# Altium PCB main_pcb.PcbDoc (part 2 of 2)
Units mm, origin at the board's own origin, x right, y up, seen from the top; angles counter-clockwise.
Board outline 134.57 x 151.73 mm, 2 copper layers (Top Layer, Bottom Layer); 69 components, 251 nets, 826 pads, 101 vias.
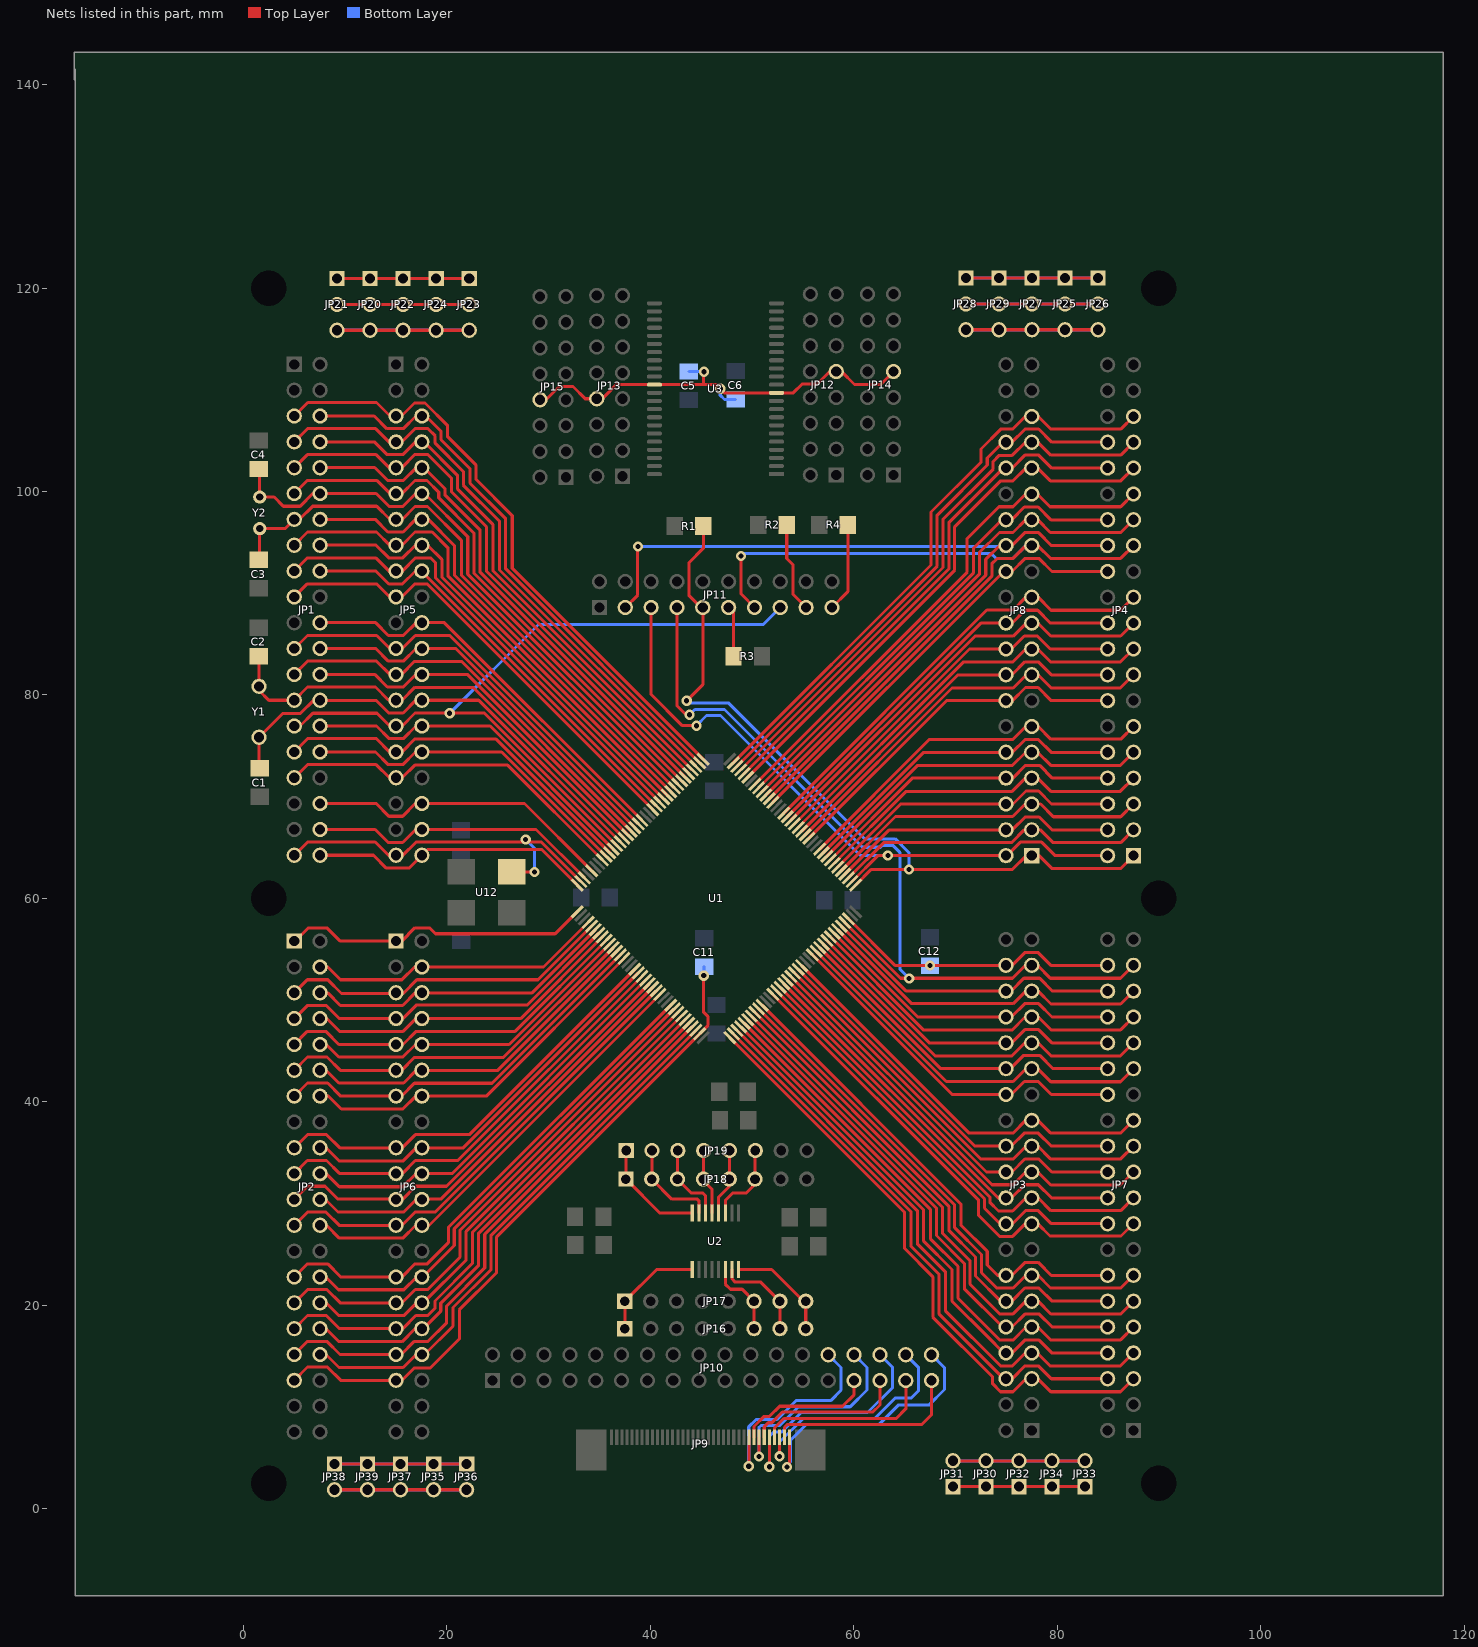
[diagram p2: the nets of this part, all layers, seen from the top]

## Via types
v1: diameter 1, hole 0.5, Top Layer to Bottom Layer, 64 vias
v2: diameter 1.5, hole 1, Top Layer to Bottom Layer, 33 vias
v3: diameter 1.5, hole 1.5, Top Layer to Bottom Layer, 4 vias

## Nets (pads, with @x,y where several pads share a name; then routed paths per layer and width w, separated by ;. In a path a pad name is that pad's centre, name@x,y a point inside that pad or via, vN(x,y) a via of type N, cw(c..) or ccw(c..) an arc to the next point about the centre after c; other vN are vias at no path point) (continued)
NetJP9_28: JP9.28 JP10.28 | length 21.3
  Top Layer w0.3: v1(49.675,4.175) 49.7,4.2 JP9.28@49.7,7.025
  Bottom Layer w0.3: v1(49.675,4.175) 49.675,8.05 50.4,8.775 52.475,8.775 54.325,10.625 57.725,10.625 58.75,11.65 58.75,13.885 JP10.28@57.495,15.14
NetJP9_29: JP9.29 JP10.29 | length 13.6
  Top Layer w0.3: JP9.29@50.2,7.025 50.2,8.075 51.2,9.075 51.725,9.075 52.725,10.075 58.9,10.075 60.035,11.21 JP10.29@60.035,12.6
NetJP9_30: JP9.30 JP10.30 | length 20.9
  Top Layer w0.3: v1(50.675,5.125) 50.7,5.15 JP9.30@50.7,7.025
  Bottom Layer w0.3: v1(50.675,5.125) 50.675,7.975 50.875,8.175 52.725,8.175 54.575,10.025 59.65,10.025 61.3,11.675 61.3,13.875 JP10.30@60.035,15.14
NetJP9_31: JP9.31 JP10.31 | length 15.7
  Top Layer w0.3: JP9.31@51.2,7.025 51.2,8.05 51.6,8.45 51.925,8.45 52.975,9.5 61.875,9.5 62.575,10.2 JP10.31@62.575,12.6
NetJP9_32: JP9.32 JP10.32 | length 23.7
  Top Layer w0.3: v1(51.7,4.125) JP9.32@51.7,7.025
  Bottom Layer w0.3: v1(51.7,4.125) 51.7,7.125 52.125,7.55 52.925,7.55 54.825,9.45 61.35,9.45 63.825,11.925 63.825,13.89 JP10.32@62.575,15.14
NetJP9_33: JP9.33 JP10.33 | length 17.4
  Top Layer w0.3: JP9.33@52.2,7.025 52.2,7.95 53.125,8.875 64.175,8.875 65.115,9.815 JP10.33@65.115,12.6
NetJP9_34: JP9.34 JP10.34 | length 23.1
  Top Layer w0.3: v1(52.7,5.15) JP9.34@52.7,7.025
  Bottom Layer w0.3: v1(52.7,5.15) 52.7,6.55 55.025,8.875 62.075,8.875 64.075,10.875 65.65,10.875 66.35,11.575 66.35,13.905 JP10.34@65.115,15.14
NetJP9_35: JP9.35 JP10.35 | length 19.3
  Top Layer w0.3: JP9.35@53.2,7.025 53.2,8 53.5,8.3 66.7,8.3 67.655,9.255 JP10.35@67.655,12.6
NetJP9_36: JP9.36 JP10.36 | length 27
  Top Layer w0.3: v1@53.275,4.125 53.275,4.175 53.7,4.6 JP9.36@53.7,7.025
  Bottom Layer w0.3: v1@53.275,4.125 53.8,4.65 53.8,6.75 55.35,8.3 62.5,8.3 64.375,10.175 67.375,10.175 68.925,11.725 68.925,13.87 JP10.36@67.655,15.14
  other v1: 53.425,4.1
NetJP11_11: JP11.11 R3.1 | length 5
  Top Layer w0.3: JP11.11@47.7,88.6 48.188,88.112 R3.1@48.188,83.793
NetJP11_17: JP11.17 R2.1 | length 8.9
  Top Layer w0.3: R2.1@53.412,96.707 53.412,93.413 54.025,92.8 54.025,89.895 JP11.17@55.32,88.6
NetJP11_19: JP11.19 R4.1 | length 8.7
  Top Layer w0.3: JP11.19@57.86,88.6 59.412,90.152 R4.1@59.412,96.707
NetJP16_1: JP16.1 JP17.1 U2.1 | length 10.6
  Top Layer w0.3: JP16.1@37.499,17.702 JP17.1@37.499,20.402 40.622,23.525 U2.1@44.125,23.525
NetJP16_6: JP16.6 JP17.6 U2.6 | length 7.7
  Top Layer w0.3: U2.6@47.375,23.525 47.375,22.075 47.875,21.575 49.025,21.575 JP17.6@50.199,20.402 JP16.6@50.199,17.702
NetJP16_7: JP16.7 JP17.7 U2.7 | length 9.2
  Top Layer w0.3: U2.7@48.025,23.525 48.025,22.6 48.35,22.275 50.865,22.275 JP17.7@52.739,20.402 JP16.7@52.739,17.702
NetJP16_8: JP16.8 JP17.8 U2.8 | length 10.5
  Top Layer w0.3: U2.8@48.675,23.525 51.925,23.525 55.279,20.171 JP16.8@55.279,17.702
NetJP18_1: JP18.1 JP19.1 U2.16 | length 10.7
  Top Layer w0.3: JP19.1@37.625,35.21 37.625,32.375 40.925,29.075 U2.16@44.125,29.075
NetJP18_2: JP18.2 JP19.2 U2.15 | length 9.5
  Top Layer w0.3: JP19.2@40.165,35.21 40.165,32.375 42.115,30.425 44.625,30.425 44.775,30.275 U2.15@44.775,29.075
NetJP18_3: JP18.3 JP19.3 U2.14 | length 7.9
  Top Layer w0.3: JP19.3@42.705,35.21 42.679,35.184 JP18.3@42.679,32.402 44.055,31.025 45.175,31.025 45.425,30.775 U2.14@45.425,29.075
NetJP18_4: JP18.4 JP19.4 U2.13 | length 6.5
  Top Layer w0.3: JP19.4@45.245,35.21 45.245,32.205 46.075,31.375 U2.13@46.075,29.075
NetJP18_5: JP18.5 JP19.5 U2.12 | length 6.6
  Top Layer w0.3: U2.12@46.725,29.075 46.725,30.65 47.785,31.71 47.785,32.428 JP19.5@47.785,35.21
NetJP18_6: JP18.6 JP19.6 U2.11 | length 8.1
  Top Layer w0.3: U2.11@47.375,29.075 47.375,30.3 48.125,31.05 49.45,31.05 50.299,31.899 50.299,35.184 JP19.6@50.325,35.21
NetJP20_1: JP20.1 JP21.1 JP22.1 JP23.1 JP24.1 | length 26
  Top Layer w0.3: JP21.1@9.203,120.933 JP23.1@22.195,120.933
  Bottom Layer w0.3: JP21.1@9.203,120.933 JP23.1@22.195,120.933
NetJP20_2: JP20.2 JP21.2 JP22.2 JP23.2 JP24.2 | length 26
  Top Layer w0.3: JP21.2@9.203,118.393 JP23.2@22.195,118.393
  Bottom Layer w0.3: JP21.2@9.203,118.393 JP23.2@22.195,118.393
NetJP20_3: JP20.3 JP21.3 JP22.3 JP23.3 JP24.3 | length 26.1
  Top Layer w0.3: JP21.3@9.203,115.853 22.128,115.853 22.161,115.886 JP23.3@22.25,115.975
  Bottom Layer w0.3: JP21.3@9.203,115.853 JP23.3@22.195,115.853
NetJP20_4: 
NetJP25_1: JP25.1 JP26.1 JP27.1 JP28.1 JP29.1 | length 26
  Top Layer w0.3: JP28.1@71.024,120.983 JP26.1@84.016,120.983
  Bottom Layer w0.3: JP28.1@71.024,120.983 JP26.1@84.016,120.983
NetJP25_2: JP25.2 JP26.2 JP27.2 JP28.2 JP29.2 | length 26
  Top Layer w0.3: JP28.2@71.024,118.443 JP26.2@84.016,118.443
  Bottom Layer w0.3: JP28.2@71.024,118.443 JP26.2@84.016,118.443
NetJP25_3: JP25.3 JP26.3 JP27.3 JP28.3 JP29.3 | length 26
  Top Layer w0.3: JP28.3@71.024,115.903 JP26.3@84.016,115.903
  Bottom Layer w0.3: JP28.3@71.024,115.903 JP26.3@84.016,115.903
NetJP30_1: JP30.1 JP31.1 JP32.1 JP33.1 JP34.1 | length 26
  Top Layer w0.3: JP31.1@69.747,2.17 JP33.1@82.739,2.17
  Bottom Layer w0.3: JP31.1@69.747,2.17 JP33.1@82.739,2.17
NetJP30_2: JP30.2 JP31.2 JP32.2 JP33.2 JP34.2 | length 26
  Top Layer w0.3: JP31.2@69.747,4.71 JP33.2@82.739,4.71
  Bottom Layer w0.3: JP31.2@69.747,4.71 JP33.2@82.739,4.71
NetJP30_3: 
NetJP35_1: JP35.1 JP36.1 JP37.1 JP38.1 JP39.1 | length 26
  Top Layer w0.3: JP38.1@8.954,4.405 JP36.1@21.946,4.405
  Bottom Layer w0.3: JP38.1@8.954,4.405 JP36.1@21.946,4.405
NetJP35_2: JP35.2 JP36.2 JP37.2 JP38.2 JP39.2 | length 26
  Top Layer w0.3: JP38.2@8.954,1.865 JP36.2@21.946,1.865
  Bottom Layer w0.3: JP38.2@8.954,1.865 JP36.2@21.946,1.865
NetJP35_3: 
NRST: JP1.29 JP5.29 JP11.15 U1.25 | length 75.5
  Top Layer w0.3: JP1.29@5,76.94 5.565,76.94 6.825,78.2 13.125,78.2 14.375,76.95 15.6,76.95 16.875,78.225 23.679,78.225 U1.25@36.707,65.197
  Bottom Layer w0.3: v1(20.275,78.2) 29,86.925 51.105,86.925 JP11.15@52.78,88.6
PA0: JP1.38 JP5.38 U1.34 | length 29
  Top Layer w0.3: JP1.38@7.54,66.78 12.945,66.78 14.225,65.5 15.65,65.5 16.93,66.78 28.76,66.78 U1.34@33.525,62.015
PA1: JP1.39 JP5.39 U1.35 U12.3 | length 37.5
  Top Layer w0.3: JP1.39@5,64.24 6.31,65.55 12.95,65.55 14.26,64.24 15.665,64.24 16.975,65.55 29.283,65.55 U1.35@33.171,61.662 ; U12.3@26.4,62.6 v1(28.6,62.6) ; v1(27.75,65.8) v1@28,65.55
  Bottom Layer w0.3: v1(27.75,65.8) 28.6,64.95 v1(28.6,62.6)
PA2: JP1.40 JP5.40 U1.36 | length 28
  Top Layer w0.3: JP1.40@7.54,64.24 12.785,64.24 14.05,62.975 16.275,62.975 18.1,64.8 29.326,64.8 U1.36@32.818,61.308 ; JP1.40@7.625,64.155 JP1.40@7.625,64.175
PA3: JP2.1 JP6.1 U1.37 | length 30.5
  Top Layer w0.3: JP2.1@5,55.8 5.075,55.8 6.35,57.075 8.25,57.075 9.525,55.8 15.55,55.8 16.85,57.1 18.3,57.1 18.875,56.525 30.651,56.525 U1.37@32.817,58.692
PA4: JP2.4 JP6.4 U1.40 | length 29.2
  Top Layer w0.3: JP2.4@7.54,53.26 8.29,53.26 9.55,52 15.575,52 16.835,53.26 29.507,53.26 U1.40@33.878,57.631
PA5: JP2.5 JP6.5 U1.41 | length 33.1
  Top Layer w0.3: JP2.5@5,50.72 6.28,52 8.3,52 9.65,50.65 15.7,50.65 17.05,52 28.954,52 U1.41@34.232,57.278
PA6: JP2.6 JP6.6 U1.42 | length 30.6
  Top Layer w0.3: JP2.6@7.54,50.72 8.28,50.72 9.525,49.475 15.65,49.475 16.895,50.72 28.381,50.72 U1.42@34.585,56.924
PA7: JP2.7 JP6.7 U1.43 | length 34.5
  Top Layer w0.3: JP2.7@5,48.18 6.27,49.45 8.175,49.45 9.445,48.18 15.655,48.18 16.975,49.5 27.868,49.5 U1.43@34.939,56.571
PA8: JP3.32 JP7.32 U1.100 | length 32.9
  Top Layer w0.3: U1.100@57.354,55.863 67.418,45.8 75.525,45.8 76.825,47.1 78.175,47.1 79.475,45.8 JP7.32@84.96,45.8
PA9: JP3.33 JP7.33 U1.101 | length 35.2
  Top Layer w0.3: U1.101@57.708,56.217 66.875,47.05 75.55,47.05 76.84,48.34 78.135,48.34 79.4,47.075 86.235,47.075 JP7.33@87.5,48.34
PA10: JP3.34 JP7.34 U1.102 | length 31.4
  Top Layer w0.3: U1.102@58.061,56.571 66.292,48.34 JP3.34@74.96,48.34 75.49,48.34 76.8,49.65 78.175,49.65 79.485,48.34 JP7.34@84.96,48.34
PA11: JP3.35 JP7.35 U1.103 | length 33.6
  Top Layer w0.3: U1.103@58.415,56.924 65.689,49.65 75.675,49.65 76.905,50.88 78.145,50.88 79.4,49.625 86.245,49.625 JP7.35@87.5,50.88
PA12: JP3.36 JP7.36 U1.104 | length 29.9
  Top Layer w0.3: U1.104@58.768,57.278 65.166,50.88 75.455,50.88 76.725,52.15 78.275,52.15 79.545,50.88 JP7.36@84.96,50.88
PA13: JP3.37 JP7.37 JP11.7 U1.105 | length 83.1
  Top Layer w0.3: JP11.7@42.62,88.6 42.62,78.93 43.5,78.05 v1(43.85,78.05) ; U1.105@59.122,57.631 64.603,52.15 75.6,52.15 76.8,53.35 78.125,53.35 79.325,52.15 86.23,52.15 JP7.37@87.5,53.42
  Bottom Layer w0.3: v1(43.85,78.05) 44.375,78.575 47.3,78.575 60.85,65.025 62.625,65.025 62.825,65.225 63.825,65.225 64.525,64.525 64.525,53.05 v1(65.45,52.125)
PA14: JP4.1 JP8.1 JP11.9 R1.1 U1.109 | length 78.2
  Top Layer w0.3: v1(43.575,79.425) 45.16,81.01 45.16,88.415 43.825,89.75 43.825,93.025 45.212,94.412 R1.1@45.212,96.607 ; U1.109@60.183,61.308 61.724,62.85 75.6,62.85 76.95,64.2 78.225,64.2 79.5,62.925 86.225,62.925 JP4.1@87.5,64.2
  Bottom Layer w0.3: v1(43.575,79.425) 43.775,79.225 47.675,79.225 61.05,65.85 64.075,65.85 65.425,64.5 v1(65.425,62.825)
PA15: JP4.2 JP8.2 JP11.5 U1.110 | length 66.5
  Top Layer w0.3: JP11.5@40.08,88.6 40.08,80.045 43.15,76.975 v1(44.525,76.975) ; U1.110@59.829,61.662 62.367,64.2 75.05,64.2 76.375,65.525 78.475,65.525 79.8,64.2 JP4.2@84.96,64.2
  Bottom Layer w0.3: v1(44.525,76.975) 45.525,77.975 46.9,77.975 60.65,64.225 v1(63.35,64.225)
PB0: JP2.10 JP6.10 U1.46 | length 33.6
  Top Layer w0.3: JP2.10@7.54,45.64 8.135,45.64 9.375,44.4 15.67,44.4 16.91,45.64 JP6.10@17.54,45.64 26.13,45.64 U1.46@35.999,55.51
PB1: JP2.11 JP6.11 U1.47 | length 37.4
  Top Layer w0.3: JP2.11@5,43.1 6.3,44.4 8.225,44.4 9.525,43.1 JP6.11@15,43.1 15.55,43.1 16.825,44.375 25.572,44.375 U1.47@36.353,55.156
PB2: JP2.12 JP6.12 U1.48 | length 35
  Top Layer w0.3: JP2.12@7.54,43.1 8.125,43.1 9.375,41.85 15.75,41.85 17,43.1 25.004,43.1 U1.48@36.707,54.803
PB3: JP4.25 JP8.25 JP11.13 U1.133 | length 82.9
  Top Layer w0.3: v1(48.9,93.65) 48.925,93.625 48.925,89.915 JP11.13@50.24,88.6 ; U1.133@51.697,69.793 73.575,91.671 73.575,92.9 74.075,93.4 75.625,93.4 76.9,94.675 78.1,94.675 79.35,93.425 86.245,93.425 JP4.25@87.5,94.68
  Bottom Layer w0.3: v1(48.9,93.65) 49.175,93.925 73.475,93.925 73.975,93.425 75.65,93.425 76.905,94.68 JP8.25@77.5,94.68
PB4: JP4.26 JP8.26 JP11.3 U1.134 | length 88.5
  Top Layer w0.3: JP11.3@37.54,88.6 38.75,89.81 38.75,94.55 v1(38.8,94.6) ; U1.134@51.344,70.147 72.975,91.778 72.975,93.325 74.33,94.68 75.53,94.68 76.8,95.95 78.175,95.95 79.445,94.68 JP4.26@84.96,94.68
  Bottom Layer w0.3: v1(38.8,94.6) 74.88,94.6 JP8.26@74.96,94.68
PB5: JP4.27 JP8.27 U1.135 | length 49.9
  Top Layer w0.3: U1.135@50.99,70.501 72.35,91.86 72.35,94 74.325,95.975 75.65,95.975 76.9,97.225 78.075,97.225 79.325,95.975 86.255,95.975 JP4.27@87.5,97.22
PB6: JP4.28 JP8.28 U1.136 | length 47.7
  Top Layer w0.3: U1.136@50.637,70.854 71.75,91.968 71.75,94.4 74.57,97.22 JP8.28@74.96,97.22 75.52,97.22 76.775,98.475 78.125,98.475 79.38,97.22 JP4.28@84.96,97.22
PB7: JP4.29 JP8.29 U1.137 | length 52
  Top Layer w0.3: U1.137@50.283,71.208 71.15,92.075 71.15,95.375 74.275,98.5 75.65,98.5 76.9,99.75 78.05,99.75 79.3,98.5 86.24,98.5 JP4.29@87.5,99.76
PB8: JP4.31 JP8.31 U1.139 | length 54
  Top Layer w0.3: U1.139@49.576,71.915 69.925,92.264 69.925,96.525 74.45,101.05 75.65,101.05 76.9,102.3 78.075,102.3 79.325,101.05 86.25,101.05 JP4.31@87.5,102.3
PB9: JP4.32 JP8.32 U1.140 | length 51.9
  Top Layer w0.3: U1.140@49.222,72.268 69.375,92.421 69.375,96.975 74.7,102.3 75.55,102.3 76.825,103.575 78.2,103.575 79.475,102.3 JP4.32@84.96,102.3
PB10: JP2.33 JP6.33 U1.69 | length 56.4
  Top Layer w0.3: JP2.33@5,15.16 6.29,16.45 8.2,16.45 9.49,15.16 JP6.33@15,15.16 15.51,15.16 16.8,16.45 18.15,16.45 19.975,18.275 19.975,19.925 23.725,23.675 23.725,26.972 U1.69@44.131,47.378
PB11: JP2.34 JP6.34 U1.70 | length 54
  Top Layer w0.3: JP2.34@7.54,15.16 8.115,15.16 9.4,13.875 15.7,13.875 16.985,15.16 JP6.34@17.54,15.16 ; JP6.34@17.81,15.16 20.6,17.95 20.6,19.775 24.35,23.525 24.35,26.89 U1.70@44.485,47.025
PB12: JP3.5 JP7.5 U1.73 | length 60.5
  Top Layer w0.3: U1.73@47.808,46.317 65,29.126 65,25.575 67.775,22.8 67.775,18.825 73.65,12.95 73.65,12.275 74.425,11.5 75.65,11.5 76.93,12.78 78.095,12.78 79.375,11.5 86.22,11.5 JP7.5@87.5,12.78
PB13: JP3.6 JP7.6 U1.74 | length 56.2
  Top Layer w0.3: U1.74@48.162,46.671 65.625,29.208 65.625,25.8 68.4,23.025 68.4,19.125 74.745,12.78 JP3.6@74.96,12.78 75.57,12.78 76.84,14.05 78.15,14.05 79.425,12.775 84.955,12.775 JP7.6@84.96,12.78
PB14: JP3.7 JP7.7 U1.75 | length 58.3
  Top Layer w0.3: U1.75@48.515,47.025 66.25,29.29 66.25,26.05 69,23.3 69,19.475 74.425,14.05 75.6,14.05 76.85,15.3 78.05,15.3 79.3,14.05 86.23,14.05 JP7.7@87.5,15.32
PB15: JP3.8 JP7.8 U1.76 | length 54.1
  Top Layer w0.3: U1.76@48.869,47.378 66.875,29.372 66.875,26.3 69.65,23.525 69.65,20.4 73.11,16.94 74.73,15.32 JP3.8@74.96,15.32 75.57,15.32 76.85,16.6 78.175,16.6 79.455,15.32 JP7.8@84.96,15.32
PC0: JP1.30 JP5.30 U1.26 | length 34.9
  Top Layer w0.3: JP1.30@7.54,76.94 7.55,76.95 13.075,76.95 14.325,75.7 15.725,75.7 16.965,76.94 24.257,76.94 U1.26@36.353,64.844
PC1: JP1.31 JP5.31 U1.27 | length 37.2
  Top Layer w0.3: JP1.31@5,74.4 6.3,75.7 13.075,75.7 14.35,74.425 15.6,74.425 16.825,75.65 24.84,75.65 U1.27@35.999,64.49
PC2: JP1.32 JP5.32 U1.28 | length 33.4
  Top Layer w0.3: JP1.32@7.54,74.4 12.975,74.4 14.225,73.15 15.675,73.15 16.925,74.4 JP5.32@17.54,74.4 25.382,74.4 U1.28@35.646,64.137
PC3: JP1.33 JP5.33 U1.29 | length 35.7
  Top Layer w0.3: JP1.33@5,71.86 6.29,73.15 13.05,73.15 14.325,71.875 15.625,71.875 16.85,73.1 25.975,73.1 U1.29@35.292,63.783
PC4: JP2.8 JP6.8 U1.44 | length 32.1
  Top Layer w0.3: JP2.8@7.54,48.18 8.22,48.18 9.5,46.9 15.65,46.9 16.93,48.18 JP6.8@17.54,48.18 27.255,48.18 U1.44@35.292,56.217
PC5: JP2.9 JP6.9 U1.45 | length 35.9
  Top Layer w0.3: JP2.9@5,45.64 6.285,46.925 8.1,46.925 9.385,45.64 15.69,45.64 16.975,46.925 26.707,46.925 U1.45@35.646,55.863
PC6: JP3.28 JP7.28 U1.96 | length 35.8
  Top Layer w0.3: U1.96@55.94,54.449 69.669,40.72 75.495,40.72 76.775,42 78.15,42 79.43,40.72 JP7.28@84.96,40.72
PC7: JP3.29 JP7.29 U1.97 | length 38.1
  Top Layer w0.3: U1.97@56.293,54.803 69.096,42 75.675,42 76.925,43.25 78.1,43.25 79.375,41.975 86.215,41.975 JP7.29@87.5,43.26
PC8: JP3.30 JP7.30 U1.98 | length 34.3
  Top Layer w0.3: U1.98@56.647,55.156 68.543,43.26 75.385,43.26 76.7,44.575 78.275,44.575 79.59,43.26 JP7.30@84.96,43.26
PC9: JP3.31 JP7.31 U1.99 | length 36.7
  Top Layer w0.3: U1.99@57.001,55.51 67.985,44.525 75.55,44.525 76.85,45.825 78.1,45.825 79.4,44.525 86.225,44.525 JP7.31@87.5,45.8
PC10: JP4.3 JP8.3 U1.111 | length 31
  Top Layer w0.3: U1.111@59.475,62.015 62.935,65.475 75.5,65.475 76.765,66.74 78.335,66.74 79.6,65.475 86.235,65.475 JP4.3@87.5,66.74
PC11: JP4.4 JP8.4 U1.112 | length 28.7
  Top Layer w0.3: U1.112@59.122,62.369 63.493,66.74 JP8.4@74.96,66.74 75.59,66.74 76.85,68 78.225,68 79.485,66.74 JP4.4@84.96,66.74
PC12: JP4.5 JP8.5 U1.113 | length 32.5
  Top Layer w0.3: U1.113@58.768,62.722 64.096,68.05 75.625,68.05 76.855,69.28 78.37,69.28 79.625,68.025 86.245,68.025 JP4.5@87.5,69.28
PC13: JP1.11 JP5.11 U1.7 | length 54.6
  Top Layer w0.3: JP1.11@5,99.8 6.3,101.1 13.1,101.1 14.425,99.775 15.575,99.775 16.875,101.075 18.05,101.075 19.2,99.925 19.2,99.375 22.675,95.9 22.675,91.957 U1.7@43.071,71.561
PC14: C4.2 JP1.12 JP5.12 U1.8 Y2.1 | length 59.9
  Top Layer w0.3: C4.2@1.493,102.212 1.6,102.106 Y2.1@1.6,99.45 3.025,99.45 3.925,98.55 5.575,98.55 6.825,99.8 13.05,99.8 14.325,98.525 15.675,98.525 16.95,99.8 17.8,99.8 22.05,95.55 22.05,91.875 U1.8@42.717,71.208
PC15: C3.2 JP1.13 JP5.13 U1.9 Y2.2 | length 59.3
  Top Layer w0.3: C3.2@1.507,93.288 1.6,93.381 Y2.2@1.6,96.35 4.09,96.35 JP1.13@5,97.26 5.01,97.25 5.5,97.25 6.8,98.55 13.1,98.55 14.4,97.25 15.6,97.25 16.875,98.525 18.1,98.525 21.425,95.2 21.425,91.793 U1.9@42.363,70.854
PD0: JP4.6 JP8.6 U1.114 | length 30.2
  Top Layer w0.3: U1.114@58.415,63.076 64.619,69.28 75.655,69.28 76.925,70.55 78.175,70.55 79.445,69.28 JP4.6@84.96,69.28
PD1: JP4.7 JP8.7 U1.115 | length 33.9
  Top Layer w0.3: U1.115@58.061,63.429 65.157,70.525 75.575,70.525 76.825,71.775 78.125,71.775 79.375,70.525 86.205,70.525 JP4.7@87.5,71.82
PD2: JP4.8 JP8.8 U1.116 | length 31.6
  Top Layer w0.3: U1.116@57.708,63.783 65.745,71.82 75.62,71.82 76.875,73.075 78.275,73.075 79.525,71.825 84.955,71.825 JP4.8@84.96,71.82
PD3: JP4.9 JP8.9 U1.117 | length 35.4
  Top Layer w0.3: U1.117@57.354,64.137 66.293,73.075 75.6,73.075 76.875,74.35 78.1,74.35 79.375,73.075 86.215,73.075 JP4.9@87.5,74.36
PD4: JP4.10 JP8.10 U1.118 | length 33.1
  Top Layer w0.3: U1.118@57.001,64.49 66.87,74.36 JP8.10@74.96,74.36 75.59,74.36 76.855,75.625 78.15,75.625 79.415,74.36 JP4.10@84.96,74.36
PD5: JP4.11 JP8.11 U1.119 | length 36.9
  Top Layer w0.3: U1.119@56.647,64.844 67.403,75.6 75.6,75.6 76.9,76.9 78.125,76.9 79.375,75.65 86.25,75.65 JP4.11@87.5,76.9
PD6: JP4.14 JP8.14 U1.122 | length 36
  Top Layer w0.3: U1.122@55.586,65.904 69.122,79.44 75.59,79.44 76.875,80.725 78.125,80.725 79.41,79.44 JP4.14@84.96,79.44
PD7: JP4.15 JP8.15 U1.123 | length 39.9
  Top Layer w0.3: U1.123@55.233,66.258 69.65,80.675 75.675,80.675 77,82 78.1,82 79.4,80.7 86.22,80.7 JP4.15@87.5,81.98
PD8: JP3.9 JP7.9 U1.77 | length 56.3
  Top Layer w0.3: U1.77@49.222,47.732 67.525,29.429 67.525,26.55 70.25,23.825 70.25,20.7 74.375,16.575 75.65,16.575 76.935,17.86 78.09,17.86 79.35,16.6 86.24,16.6 JP7.9@87.5,17.86
PD9: JP3.10 JP7.10 U1.78 | length 52
  Top Layer w0.3: U1.78@49.576,48.085 68.125,29.536 68.125,26.85 70.875,24.1 70.875,21.625 74.64,17.86 75.56,17.86 76.825,19.125 78.25,19.125 79.515,17.86 JP7.10@84.96,17.86
PD10: JP3.11 JP7.11 U1.79 | length 54.1
  Top Layer w0.3: U1.79@49.929,48.439 68.725,29.643 68.725,27.075 71.425,24.375 71.425,22.075 74.375,19.125 75.625,19.125 76.9,20.4 78.125,20.4 79.375,19.15 86.25,19.15 JP7.11@87.5,20.4
PD11: JP3.12 JP7.12 U1.80 | length 50
  Top Layer w0.3: U1.80@50.283,48.792 69.35,29.725 69.35,27.375 71.975,24.75 71.975,22.875 74.45,20.4 75.525,20.4 76.825,21.7 78.2,21.7 79.5,20.4 JP7.12@84.96,20.4
PD12: JP3.13 JP7.13 U1.81 | length 52.1
  Top Layer w0.3: U1.81@50.637,49.146 69.925,29.857 69.925,27.625 72.55,25 72.55,23.2 74.05,21.7 75.675,21.7 76.9,22.925 76.915,22.94 78.11,22.94 79.35,21.7 86.26,21.7 JP7.13@87.5,22.94
PD13: JP3.14 JP7.14 U1.82 | length 48
  Top Layer w0.3: U1.82@50.99,49.499 70.525,29.965 70.525,27.9 73.125,25.3 73.125,23.95 74.135,22.94 JP3.14@74.96,22.94 75.565,22.94 76.85,24.225 78.125,24.225 79.425,22.925 84.945,22.925 JP7.14@84.96,22.94
PD14: JP3.17 JP7.17 U1.85 | length 47.7
  Top Layer w0.3: U1.85@52.051,50.56 72.275,30.336 72.275,28.825 74.325,26.775 75.625,26.775 76.85,28 78.1,28 79.3,26.8 86.28,26.8 JP7.17@87.5,28.02
PD15: JP3.18 JP7.18 U1.86 | length 43.6
  Top Layer w0.3: U1.86@52.404,50.914 72.85,30.468 72.85,29.55 74.375,28.025 75.6,28.025 76.875,29.3 78.15,29.3 79.43,28.02 JP7.18@84.96,28.02
PE0: JP4.33 JP8.33 U1.141 | length 56.3
  Top Layer w0.3: U1.141@48.869,72.622 68.775,92.528 68.775,97.275 73.7,102.2 73.7,102.95 74.3,103.55 75.575,103.55 76.875,104.85 78.1,104.85 79.375,103.575 86.235,103.575 JP4.33@87.5,104.84
PE1: JP4.34 JP8.34 U1.142 | length 54.1
  Top Layer w0.3: U1.142@48.515,72.975 68.2,92.66 68.2,97.675 73.125,102.6 73.125,103.3 74.665,104.84 75.54,104.84 76.85,106.15 78.175,106.15 79.475,104.85 JP4.34@84.95,104.85
PE2: JP1.5 JP5.5 U1.1 | length 60.8
  Top Layer w0.3: JP1.5@5,107.42 6.33,108.75 13.075,108.75 14.405,107.42 JP5.5@15,107.42 15.545,107.42 16.825,108.7 17.85,108.7 20.075,106.475 20.075,105.375 22.875,102.575 22.875,101.175 26.425,97.625 26.425,92.449 U1.1@45.192,73.683
PE3: JP1.6 JP5.6 U1.2 | length 56.7
  Top Layer w0.3: JP1.6@7.54,107.42 7.545,107.425 12.85,107.425 14.1,106.175 15.725,106.175 16.97,107.42 JP5.6@17.54,107.42 17.93,107.42 19.425,105.925 19.425,105.1 22.275,102.25 22.275,100.825 25.775,97.325 25.775,92.392 U1.2@44.838,73.329
PE4: JP1.7 JP5.7 U1.3 | length 58.9
  Top Layer w0.3: JP1.7@5,104.88 6.295,106.175 13,106.175 14.295,104.88 JP5.7@15,104.88 15.005,104.875 15.575,104.875 16.875,106.175 18.15,106.175 18.85,105.475 18.85,104.75 21.625,101.975 21.625,100.625 25.175,97.075 25.175,92.285 U1.3@44.485,72.975
PE5: JP1.8 JP5.8 U1.4 | length 54.4
  Top Layer w0.3: JP1.8@7.54,104.88 12.87,104.88 14.125,103.625 15.675,103.625 16.93,104.88 JP5.8@17.54,104.88 17.745,104.88 21.025,101.6 21.025,100.275 24.525,96.775 24.525,92.228 U1.4@44.131,72.622
PE6: JP1.9 JP5.9 U1.5 | length 56.7
  Top Layer w0.3: JP1.9@5,102.34 6.285,103.625 13.05,103.625 14.335,102.34 15.565,102.34 16.875,103.65 18.1,103.65 20.45,101.3 20.45,99.975 23.9,96.525 23.9,92.146 U1.5@43.778,72.268
PE7: JP2.22 JP6.22 U1.58 | length 42.4
  Top Layer w0.3: JP2.22@7.54,30.4 8.075,30.4 9.3,29.175 15.775,29.175 17,30.4 JP6.22@17.54,30.4 17.565,30.425 19.4,30.425 U1.58@40.242,51.267
PE8: JP2.23 JP6.23 U1.59 | length 46.2
  Top Layer w0.3: JP2.23@5,27.86 6.315,29.175 8.1,29.175 9.415,27.86 15.585,27.86 16.875,29.15 18.832,29.15 U1.59@40.596,50.914
PE9: JP2.24 JP6.24 U1.60 | length 43.9
  Top Layer w0.3: JP2.24@7.54,27.86 8.165,27.86 9.425,26.6 15.675,26.6 16.925,27.85 18.239,27.85 U1.60@40.949,50.56
PE10: JP2.27 JP6.27 U1.63 | length 50
  Top Layer w0.3: JP2.27@5,22.78 6.295,24.075 8.275,24.075 9.55,22.8 15.6,22.8 16.875,24.075 18.075,24.075 20.15,26.15 20.15,27.64 U1.63@42.01,49.499
PE11: JP2.28 JP6.28 U1.64 | length 47.7
  Top Layer w0.3: JP2.28@7.54,22.78 8.095,22.78 9.35,21.525 15.775,21.525 17.03,22.78 17.63,22.78 20.725,25.875 20.725,27.507 U1.64@42.363,49.146
PE12: JP2.29 JP6.29 U1.65 | length 52.2
  Top Layer w0.3: JP2.29@5,20.24 6.31,21.55 8.2,21.55 9.51,20.24 15.59,20.24 16.9,21.55 18.125,21.55 21.3,24.725 21.3,27.375 U1.65@42.717,48.792
PE13: JP2.30 JP6.30 U1.66 | length 49.9
  Top Layer w0.3: JP2.30@7.54,20.24 7.555,20.225 8.15,20.225 9.4,18.975 15.775,18.975 17.04,20.24 17.69,20.24 21.9,24.45 21.9,27.268 U1.66@43.071,48.439
PE14: JP2.31 JP6.31 U1.67 | length 54.3
  Top Layer w0.3: JP2.31@5,17.7 6.3,19 8.15,19 9.45,17.7 15.65,17.7 16.95,19 18.125,19 18.825,19.7 18.825,20.425 22.525,24.125 22.525,27.186 U1.67@43.424,48.085
PE15: JP2.32 JP6.32 U1.68 | length 52
  Top Layer w0.3: JP2.32@7.54,17.7 8.125,17.7 9.4,16.425 15.6,16.425 16.875,17.7 17.675,17.7 19.4,19.425 19.4,20.2 23.125,23.925 23.125,27.079 U1.68@43.778,47.732
PF0: JP1.14 JP5.14 U1.10 | length 48.3
  Top Layer w0.3: JP1.14@7.54,97.26 12.965,97.26 14.2,96.025 15.7,96.025 16.935,97.26 18.165,97.26 20.75,94.675 20.75,91.76 U1.10@42.01,70.501
PF1: JP1.15 JP5.15 U1.11 | length 50.6
  Top Layer w0.3: JP1.15@5,94.72 6.305,96.025 13.075,96.025 14.38,94.72 15.57,94.72 15.6,94.75 16.875,96.025 18.55,96.025 20.1,94.475 20.1,91.703 U1.11@41.656,70.147
PF2: JP1.16 JP5.16 U1.12 | length 46.1
  Top Layer w0.3: JP1.16@7.54,94.72 13.03,94.72 14.275,93.475 15.675,93.475 16.92,94.72 18.105,94.72 19.5,93.325 19.5,91.596 U1.12@41.303,69.793
PF3: JP1.17 JP5.17 U1.13 | length 48.4
  Top Layer w0.3: JP1.17@5,92.18 6.295,93.475 13,93.475 14.325,92.15 15.6,92.15 16.925,93.475 18.4,93.475 18.9,92.975 18.9,91.489 U1.13@40.949,69.44
PF4: JP1.18 JP5.18 U1.14 | length 43.7
  Top Layer w0.3: JP1.18@7.54,92.18 13.02,92.18 14.3,90.9 15.625,90.9 16.867,92.142 17.54,92.142 U1.14@40.596,69.086
PF5: JP1.19 JP5.19 U1.15 | length 46
  Top Layer w0.3: JP1.19@5,89.64 6.285,90.925 13.075,90.925 14.375,89.625 15.575,89.625 16.875,90.925 18.05,90.925 U1.15@40.242,68.733
PF6: JP1.22 JP5.22 U1.18 | length 40.7
  Top Layer w0.3: JP1.22@7.54,87.1 13,87.1 14.25,85.85 15.725,85.85 16.975,87.1 19.754,87.1 U1.18@39.181,67.672
PF7: JP1.23 JP5.23 U1.19 | length 43.1
  Top Layer w0.3: JP1.23@5,84.56 6.29,85.85 13.1,85.85 14.425,84.525 15.575,84.525 16.9,85.85 20.296,85.85 U1.19@38.828,67.319
PF8: JP1.24 JP5.24 U1.20 | length 39.2
  Top Layer w0.3: JP1.24@7.54,84.56 13.015,84.56 14.25,83.325 15.725,83.325 16.96,84.56 20.879,84.56 U1.20@38.474,66.965
PF9: JP1.25 JP5.25 U1.21 | length 41.6
  Top Layer w0.3: JP1.25@5,82.02 6.305,83.325 13.075,83.325 14.375,82.025 15.55,82.025 16.825,83.3 21.432,83.3 U1.21@38.121,66.611
PF10: JP1.26 JP5.26 U1.22 | length 37.8
  Top Layer w0.3: JP1.26@7.54,82.02 12.905,82.02 14.15,80.775 15.725,80.775 16.97,82.02 22.005,82.02 U1.22@37.767,66.258
PF11: JP2.13 JP6.13 U1.49 | length 38.9
  Top Layer w0.3: JP2.13@5,40.56 6.29,41.85 8.275,41.85 9.565,40.56 15.535,40.56 16.8,41.825 24.436,41.825 U1.49@37.06,54.449
PF12: JP2.14 JP6.14 U1.50 | length 36.5
  Top Layer w0.3: JP2.14@7.54,40.56 8.365,40.56 9.625,39.3 15.675,39.3 16.935,40.56 23.878,40.56 U1.50@37.414,54.096
PF13: JP2.17 JP6.17 U1.53 | length 41.8
  Top Layer w0.3: JP2.17@5,35.48 6.295,36.775 8.175,36.775 9.475,35.475 15.6,35.475 16.9,36.775 22.214,36.775 U1.53@38.474,53.035
PF14: JP2.18 JP6.18 U1.54 | length 39.5
  Top Layer w0.3: JP2.18@7.54,35.48 8.12,35.48 9.4,34.2 15.725,34.2 17,35.475 18.125,35.475 21.621,35.475 U1.54@38.828,52.681
PF15: JP2.19 JP6.19 U1.55 | length 43.2
  Top Layer w0.3: JP2.19@5,32.94 6.285,34.225 8.175,34.225 9.425,32.975 15.65,32.975 16.9,34.225 21.079,34.225 U1.55@39.181,52.328
PG0: JP2.20 JP6.20 U1.56 | length 40.9
  Top Layer w0.3: JP2.20@7.54,32.94 8.135,32.94 9.425,31.65 15.675,31.65 16.965,32.94 20.501,32.94 U1.56@39.535,51.974
PG1: JP2.21 JP6.21 U1.57 | length 44.7
  Top Layer w0.3: JP2.21@5,30.4 6.3,31.7 8.025,31.7 9.3,30.425 15.65,30.425 16.925,31.7 19.968,31.7 U1.57@39.889,51.621
PG2: JP3.19 JP7.19 U1.87 | length 45.7
  Top Layer w0.3: U1.87@52.758,51.267 73.375,30.65 73.375,30.125 74.225,29.275 75.625,29.275 76.9,30.55 78.125,30.55 79.375,29.3 86.24,29.3 JP7.19@87.5,30.56
PG3: JP3.20 JP7.20 U1.88 | length 41.6
  Top Layer w0.3: U1.88@53.111,51.621 74.172,30.56 75.51,30.56 76.8,31.85 78.15,31.85 79.44,30.56 JP7.20@84.96,30.56
PG4: JP3.21 JP7.21 U1.89 | length 43.9
  Top Layer w0.3: U1.89@53.465,51.974 73.589,31.85 75.65,31.85 76.9,33.1 78.1,33.1 79.375,31.825 86.225,31.825 JP7.21@87.5,33.1
PG5: JP3.22 JP7.22 U1.90 | length 40.2
  Top Layer w0.3: U1.90@53.819,52.328 73.046,33.1 JP3.22@74.96,33.1 75.55,33.1 76.825,34.375 78.2,34.375 79.475,33.1 JP7.22@84.96,33.1
PG6: JP3.23 JP7.23 U1.91 | length 42.4
  Top Layer w0.3: U1.91@54.172,52.681 72.454,34.4 75.7,34.4 76.95,35.65 78.075,35.65 79.325,34.4 86.26,34.4 JP7.23@87.5,35.64
PG7: JP3.24 JP7.24 U1.92 | length 38.7
  Top Layer w0.3: U1.92@54.526,53.035 71.921,35.64 75.465,35.64 76.75,36.925 78.15,36.925 79.435,35.64 JP7.24@84.96,35.64
PG8: JP3.25 JP7.25 U1.93 | length 41
  Top Layer w0.3: U1.93@54.879,53.389 71.343,36.925 75.65,36.925 76.9,38.175 78.1,38.175 79.325,36.95 86.27,36.95 JP7.25@87.5,38.18
PG9: JP4.16 JP8.16 U1.124 | length 37.5
  Top Layer w0.3: U1.124@54.879,66.611 70.248,81.98 75.555,81.98 76.825,83.25 78.15,83.25 79.42,81.98 JP4.16@84.96,81.98
PG10: JP4.17 JP8.17 U1.125 | length 41.3
  Top Layer w0.3: U1.125@54.526,66.965 70.811,83.25 75.65,83.25 76.92,84.52 78.08,84.52 79.35,83.25 86.23,83.25 JP4.17@87.5,84.52
PG11: JP4.18 JP8.18 U1.126 | length 39
  Top Layer w0.3: U1.126@54.172,67.319 71.374,84.52 75.495,84.52 76.775,85.8 78.05,85.8 79.33,84.52 JP4.18@84.96,84.52
PG12: JP4.19 JP8.19 U1.127 | length 42.8
  Top Layer w0.3: U1.127@53.819,67.672 71.921,85.775 75.675,85.775 76.96,87.06 78.115,87.06 79.375,85.8 86.24,85.8 JP4.19@87.5,87.06
PG13: JP4.20 JP8.20 U1.128 | length 40.4
  Top Layer w0.3: U1.128@53.465,68.026 72.499,87.06 75.56,87.06 76.825,88.325 78.075,88.325 79.34,87.06 JP4.20@84.96,87.06
PG14: JP4.21 JP8.21 U1.129 | length 44.2
  Top Layer w0.3: U1.129@53.111,68.379 73.082,88.35 75.65,88.35 76.9,89.6 78.125,89.6 79.4,88.325 86.225,88.325 JP4.21@87.5,89.6
PG15: JP4.24 JP8.24 U1.132 | length 43.4
  Top Layer w0.3: U1.132@52.051,69.44 74.751,92.14 75.565,92.14 76.85,93.425 78.2,93.425 79.485,92.14 JP4.24@84.96,92.14
PH0: C2.2 JP1.27 JP5.27 U1.23 Y1.2 | length 47.4
  Top Layer w0.3: C2.2@1.493,83.812 1.538,83.768 1.538,80.437 2.495,79.48 JP1.27@5,79.48 6.295,80.775 12.975,80.775 14.25,79.5 15.6,79.5 16.85,80.75 22.568,80.75 U1.23@37.414,65.904
PH1: C1.2 JP1.28 JP5.28 U1.24 Y1.1 | length 46.9
  Top Layer w0.3: C1.2@1.607,72.788 1.538,72.857 Y1.1@1.538,75.845 3.867,78.175 5.6,78.175 6.9,79.475 13.025,79.475 14.275,78.225 15.7,78.225 16.955,79.48 23.131,79.48 U1.24@37.06,65.551 ; JP1.28@7.54,79.48 JP1.28@7.545,79.475
RFU: JP4.35 JP8.35 U1.143 | length 58.3
  Top Layer w0.3: U1.143@48.162,73.329 67.6,92.767 67.6,97.975 72.5,102.875 72.5,104.175 74.45,106.125 75.6,106.125 76.85,107.375 78.15,107.375 79.4,106.125 86.245,106.125 JP4.35@87.5,107.38
VBAT: JP1.10 JP5.10 U1.6 | length 52.3
  Top Layer w0.3: JP1.10@7.54,102.34 7.55,102.35 12.9,102.35 14.175,101.075 15.725,101.075 16.99,102.34 JP5.10@17.54,102.34 17.76,102.34 19.8,100.3 19.8,99.675 23.275,96.2 23.275,92.064 U1.6@43.424,71.915
VCAP_1: C11.1 JP2.35 JP6.35 U1.71 | length 65.9
  Top Layer w0.3: JP2.35@5,12.62 6.305,13.925 8.25,13.925 9.555,12.62 JP6.35@15,12.62 15.58,12.62 16.81,13.85 18.4,13.85 21.225,16.675 21.225,19.55 24.9,23.225 24.9,26.733 45.65,47.483 45.65,48.4 45.25,48.8 v1(45.25,52.4)
  Bottom Layer w0.3: v1(45.25,52.4) 45.293,52.443 C11.1@45.293,53.287
VCAP_2: C12.1 JP3.38 JP7.38 U1.106 | length 28.5
  Top Layer w0.3: U1.106@59.475,57.985 64.04,53.42 75.57,53.42 76.85,54.7 78.1,54.7 79.38,53.42 JP7.38@84.96,53.42
  Bottom Layer w0.3: JP7.38@84.96,53.42 JP7.38@85.02,53.42
  other v1: 67.493,53.388
VCC_SRAM: C5.2 C6.2 JP12.9 JP13.8 JP14.9 JP15.8 U3.11 U3.33 | length 43.7
  Top Layer w0.3: JP15.8@29.16,109.02 29.745,109.02 31.05,110.325 32.4,110.325 33.605,109.12 JP13.8@34.735,109.12 35.27,109.12 36.65,110.5 46.475,110.5 47.275,109.7 54.05,109.7 54.925,110.575 56.4,110.575 57.61,111.785 58.815,111.785 60.075,110.525 62.64,110.525 JP14.9@63.9,111.785 ; 45.225,110.5 45.225,111.725 v1(45.275,111.775)
  Bottom Layer w0.3: C5.2@43.793,111.788 45.262,111.788 v1(45.275,111.775) ; v1(46.877,110.098) 46.877,109.448 47.289,109.036 C6.2@48.396,109.036
VDD_1: 
VDD_2: 
VDD_3: 
VDD_4: 
VDD_5: 
VDD_6: 
VDD_7: 
VDD_8: 
VDD_9: 
VDD_10: 
VDD_11: 
VDD_12: 
VDDA: 
VREF+: JP1.36 JP5.36 U1.32 | length 30.5
  Top Layer w0.3: JP1.36@7.54,69.32 13.055,69.32 14.3,68.075 15.65,68.075 16.895,69.32 27.634,69.32 U1.32@34.232,62.722
pads on no net: JP9.0 U3.1 U3.2 U3.15 U3.21 U3.22 U3.23 U3.24 U3.25 U3.37 U3.42 U3.43 U3.44

## Polygon pours and split planes (outlines as drawn)
+3V3 on Top Layer (hatched 90Degree grid 0.1 track 0.3, remove dead copper): 29.875,60 46.175,76.3 46.275,76.4 62.85,59.825 46.425,43.4 29.9,59.925
GND on Bottom Layer (hatched 90Degree grid 0.1 track 0.3, remove dead copper): 46.55,76.7 29.825,59.975 46.4,43.4 62.825,59.825 62.825,59.9 46.475,76.25 46.1,76.25
GND on Bottom Layer (hatched 90Degree grid 0.1 track 0.3, remove dead copper): -1.1,123.575 -1.1,-1.075 93.95,-1.075 93.95,123.675 -1.2,123.675

## Keep-outs
Keep-Out Layer:
  lines w0.254: 0,0 92.5,0 92.5,122.5 0,122.5 0,0